# EAGLE board Base station 1.8 (EAGLE 7.6.0)
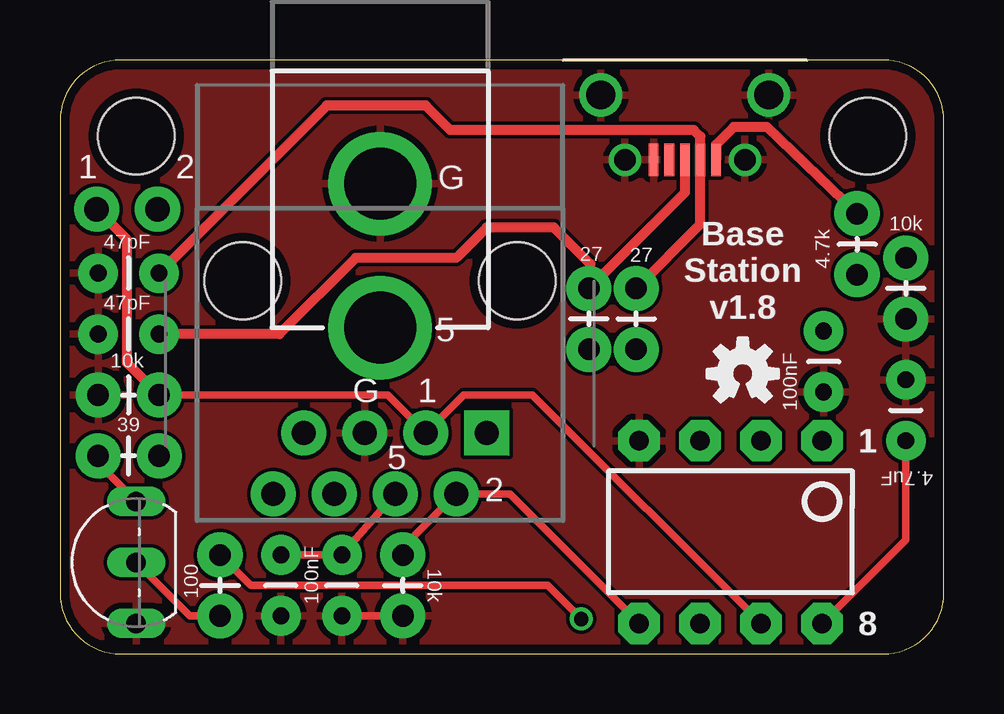
[diagram p0: board, top side]
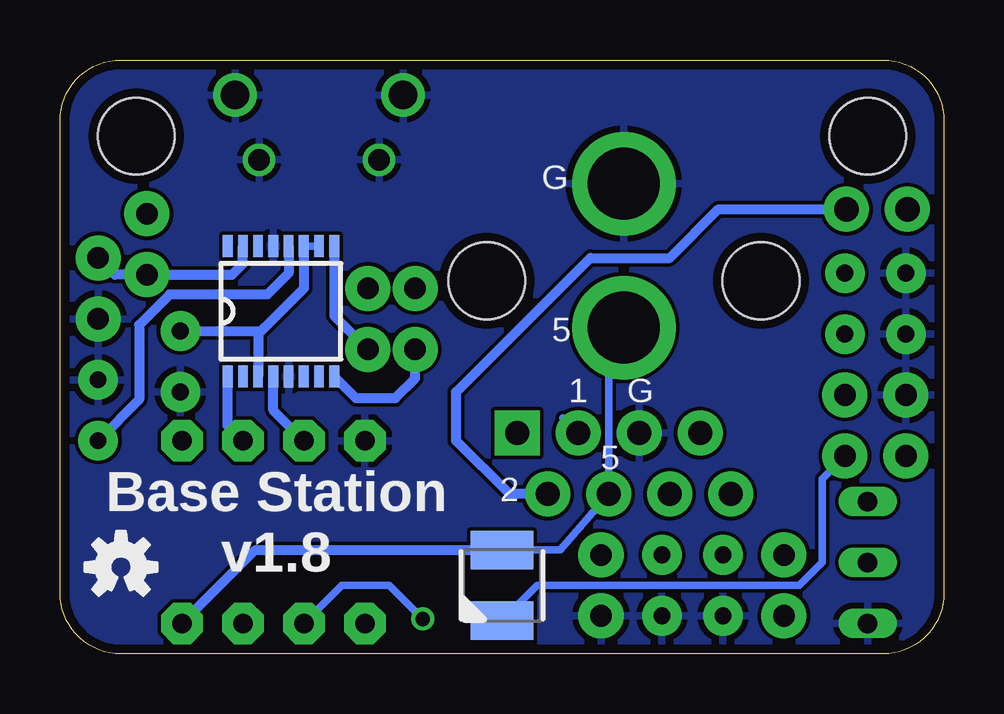
[diagram p1: board, bottom side, seen from below]

Size 36.83 x 24.77 mm. Coordinates in mm from the lower left corner, seen from the top.
Outline: 2.54,0 34.29,0 arc90 36.83,2.54 36.83,22.23 arc90 34.29,24.77 2.54,24.77 arc90 0,22.23 0,2.54 arc90 2.54,0
Copper layers (1*16): Top 0.0356mm / dielectric 1.5011mm / Bottom 0.0356mm
Design rules "LaenPCBOrder": minimum track width 6mil, minimum drill 13mil, track to track 6mil, track to pad 6mil, pad to pad 6mil, via to via 6mil, smd to smd 6mil, copper to edge 15mil, drill to drill 6mil, minimum pad ring 7mil, minimum via ring 7mil, stop-mask expansion 3mil, vias tented up to drill 0mil, thermal gap 10mil
Holes 3.2 mm at 3.17,21.59 33.66,21.59

## Footprints (pad centres in the part's own frame; a part is rotated, then mirrored left to right if it is on the bottom)
CAP-PTH-SMALL = drill 0.7 pad 1.651: 1 0,0; 2 2.54,0
SSOP16 = smd 0.914 x 0.406: 1 -2.718,2.223; 2 -2.718,1.587; 3 -2.718,0.953; 4 -2.718,0.318; 5 -2.718,-0.318; 6 -2.718,-0.953; 7 -2.718,-1.587; 8 -2.718,-2.223; 9 2.718,-2.223; 10 2.718,-1.587; 11 2.718,-0.953; 12 2.718,-0.318; 13 2.718,0.318; 14 2.718,0.953; 15 2.718,1.587; 16 2.718,2.223
POWER_JACK_PTH = drill 2.997 pad 4.318: GND 0,7.7; PWR 0,13.7
1X02_NO_SILK = drill 1.016 pad 1.88: 1 0,0; 2 2.54,0
PLCC-2 = smd 2.6 x 1.6: ANODE 0,1.475; CATHODE 0,-1.475
TO92-EBC-OVAL = drill 0.813 long: B 0,-1.27; C 2.54,-1.27; E -2.54,-1.27
AXIAL-0.1 = drill 0.9 pad 1.88: P$1 0,0; P$2 2.54,0
DIP08 = drill 0.813 pad 1.727 octagon: 1 -3.81,-3.81; 2 -1.27,-3.81; 3 1.27,-3.81; 4 3.81,-3.81; 5 3.81,3.81; 6 1.27,3.81; 7 -1.27,3.81; 8 -3.81,3.81
RJ45-8 = drill 1 pad 1.88 square: 1 -4.445,6.35 | drill 1 pad 1.88: 2 -3.175,8.89; 3 -1.905,6.35; 4 -0.635,8.89; 5 0.635,6.35; 6 1.905,8.89; 7 3.175,6.35; 8 4.445,8.89 | hole 3.2: -5.715,0; 5.715,0
USB_HORZ_REINFORCED_MICRO = drill 1.2: G1 -3.5,0; G2 3.5,0 | smd 0.4 x 1.35: P1 -1.3,2.7; P2 -0.65,2.7; P3 0,2.7; P4 0.65,2.7; P5 1.3,2.7 | drill 0.9: P$1 -2.5,2.7; P$2 2.5,2.7

## Placement (x,y rotation side)
C1  47pF  [CAP-PTH-SMALL]  1.59,15.88 0 top
C2  47pF  [CAP-PTH-SMALL]  4.13,13.34 180 top
C5  100nF  [CAP-PTH-SMALL]  11.75,4.13 270 top
C6  100nF  [CAP-PTH-SMALL]  9.21,4.13 270 top
C7  100nF  [CAP-PTH-SMALL]  31.81,13.46 270 top
C8  4.7uF  [CAP-PTH-SMALL]  35.24,8.89 90 top
IC1  FT230XS  [SSOP16]  27.62,14.29 90 bottom
J1  POWER_JACKPTH  [POWER_JACK_PTH]  13.34,27.3 180 top
JP2  [1X02_NO_SILK]  1.52,18.54 0 top
LED1  [PLCC-2]  18.41,2.86 0 bottom
Q1  2222A  [TO92-EBC-OVAL]  1.91,3.81 90 top
R1  39  [AXIAL-0.1]  1.59,8.26 0 top
R2  100  [AXIAL-0.1]  6.67,4.13 270 top
R3  10k  [AXIAL-0.1]  4.13,10.79 180 top
R5  10k  [AXIAL-0.1]  14.29,4.13 270 top
R13  27  [AXIAL-0.1]  22.03,12.7 90 top
R14  4.7k  [AXIAL-0.1]  33.21,15.81 90 top
R15  10k  [AXIAL-0.1]  35.24,13.97 90 top
R16  27  [AXIAL-0.1]  24,15.24 270 top
U2  TINY85-20-DIP  [DIP08]  27.94,5.08 180 top
U$1  [OSHW-LOGO-S]  28.45,11.68 0 top
U$2  [OSHW-LOGO-S]  34.29,3.62 0 bottom
U$3  RJ45  [RJ45-8]  13.34,15.56 180 top
U$4  USB_SOCKET_MICRO_VERTREINFORCED  [USB_HORZ_REINFORCED_MICRO]  26.04,23.3 180 top

## Library data of the parts
C1 C2 C5-C8 = SparkFun-Capacitors
IC1 = ftdichip
J1 = Andy-library; PROD_ID: PRT-00119
JP2 = SparkFun-Connectors
LED1 Q1 U$3 U$4 = Andy-library
R1-R3 R5 R13-R16 = SparkFun-Resistors
U2 = SparkFun-DigitalIC; PROD_ID: IC-09445
U$1 U$2 = SparkFun-Aesthetics

## Nets
3.3VDC: U$3.7
5VDC: C5.1 C6.1 C8.1 IC1.12 J1.PWR LED1.ANODE U2.8 U$3.4
12VDC: U$3.6
85_RX: IC1.1 U2.2
85_TX: IC1.4 U2.3
GND: C1.1 C2.2 C5.2 C6.2 C7.2 C8.2 IC1.5 IC1.13 J1.GND Q1.E R3.P$2 R5.P$2 R15.P$1 U2.4 U$3.5 U$4.G1 U$4.G2 U$4.P5 U$4.P$1 U$4.P$2
IN1: U$3.1
IN2: U$3.8
N$1: Q1.C R1.P$1
N$2: LED1.CATHODE R1.P$2
N$4: R2.P$1 U2.6
N$5: Q1.B R2.P$2
N$9: C1.2 R16.P$1 U$4.P2
N$10: C2.1 R13.P$2 U$4.P3
N$12: R14.P$2 U$4.P1
N$13: IC1.9 R16.P$2
N$16: C7.1 IC1.3 IC1.10 IC1.11
N$17: IC1.15 R14.P$1 R15.P$2
N$18: IC1.8 R13.P$1
OUT1: JP2.1 R3.P$1 U2.7 U$3.3
OUT2: JP2.2 R5.P$1 U2.5 U$3.2

## Tracks (layer width: path | path; a pad name or v marks a point on that pad's centre or on a via)
5VDC
  Top 0.305: U$3.4 C5.1 C6.1 | C8.1 35.24,4.76 U2.8
  Bottom 0.305: LED1.ANODE 15.99,4.33 U$3.4 13.97,12.97 J1.PWR
  Bottom 0.406: U2.8 28.69,4.33 LED1.ANODE | IC1.12 27.3,15.88 28.19,14.99 32.26,14.99 33.53,13.72 33.53,10.6 C8.1
85_RX
  Bottom 0.406: U2.2 29.84,9.53 IC1.1
85_TX
  Bottom 0.406: IC1.4 27.94,10.16 U2.3
GND
  Top 0.305: R5.P$2 C5.2
  pour Bottom: -1.27,25.4 39.37,25.4 39.37,-1.27 -1.27,-1.27
  pour Top: -1.27,25.4 39.37,25.4 39.37,-1.27 -1.27,-1.27
N$1
  Top 0.305: Q1.C 1.59,7.94 R1.P$1
N$2
  Bottom 0.305: LED1.CATHODE 16.94,2.86 6.03,2.86 5.08,3.81 5.08,7.3 R1.P$2
N$4  (via drill 0.6)
  Top 0.305: R2.P$1 7.94,2.86 20.32,2.86 v21.72,1.46
  Bottom 0.305: U2.6 25.08,2.86 23.11,2.86 v21.72,1.46
N$5
  Top 0.305: Q1.B 5.4,1.59 R2.P$2
N$9
  Top 0.406: C1.2 11.11,22.86 15.24,22.86 16.26,21.84 26.42,21.84 26.68,21.57 U$4.P2 26.68,17.92 R16.P$1
N$10
  Top 0.406: U$4.P3 26.04,19.24 R13.P$2 22.1,15.3 22.1,16.26 20.57,17.78 17.78,17.78 16.51,16.51 12.32,16.51 9.14,13.34 C2.1
N$12
  Top 0.406: R14.P$2 29.46,21.97 28.07,21.97 27.34,21.24 U$4.P1
N$13
  Bottom 0.406: IC1.9 25.4,14.1 R16.P$2
N$16
  Bottom 0.305: IC1.10 IC1.11
  Bottom 0.406: IC1.11 26.67,15.24 28.32,13.59 28.45,13.46 | 28.45,13.46 28.57,13.34 IC1.3 | C7.1 28.45,13.46
N$17
  Bottom 0.406: R15.P$2 34.54,15.81 R14.P$1 29.65,15.81 29.21,16.26 IC1.15
N$18
  Bottom 0.406: IC1.8 24.5,10.67 22.86,10.67 22.04,11.49 R13.P$1
OUT1
  Top 0.305: U2.7 19.68,10.79 16.83,10.79 U$3.3 13.65,10.79 R3.P$1
  Top 0.406: R3.P$1 2.79,12.13 2.79,17.27 JP2.1
  Bottom 0.305: 15.88,9.84 U$3.3
OUT2
  Top 0.305: U2.5 18.73,6.67 U$3.2 14.29,4.45 R5.P$1
  Bottom 0.406: U$3.2 18.1,6.67 20.32,8.89 20.32,10.92 14.73,16.51 11.43,16.51 9.4,18.54 JP2.2

## Text on the board
tNames: 1 | 2 | G | Base / Station / v1.8 | 5 | G | 1 | 1 | 5 | 2 | 8
bNames: G | 5 | G | 1 | 5 | 2 | Base Station / v1.8